# EAGLE board ALU (EAGLE 9.6.2)
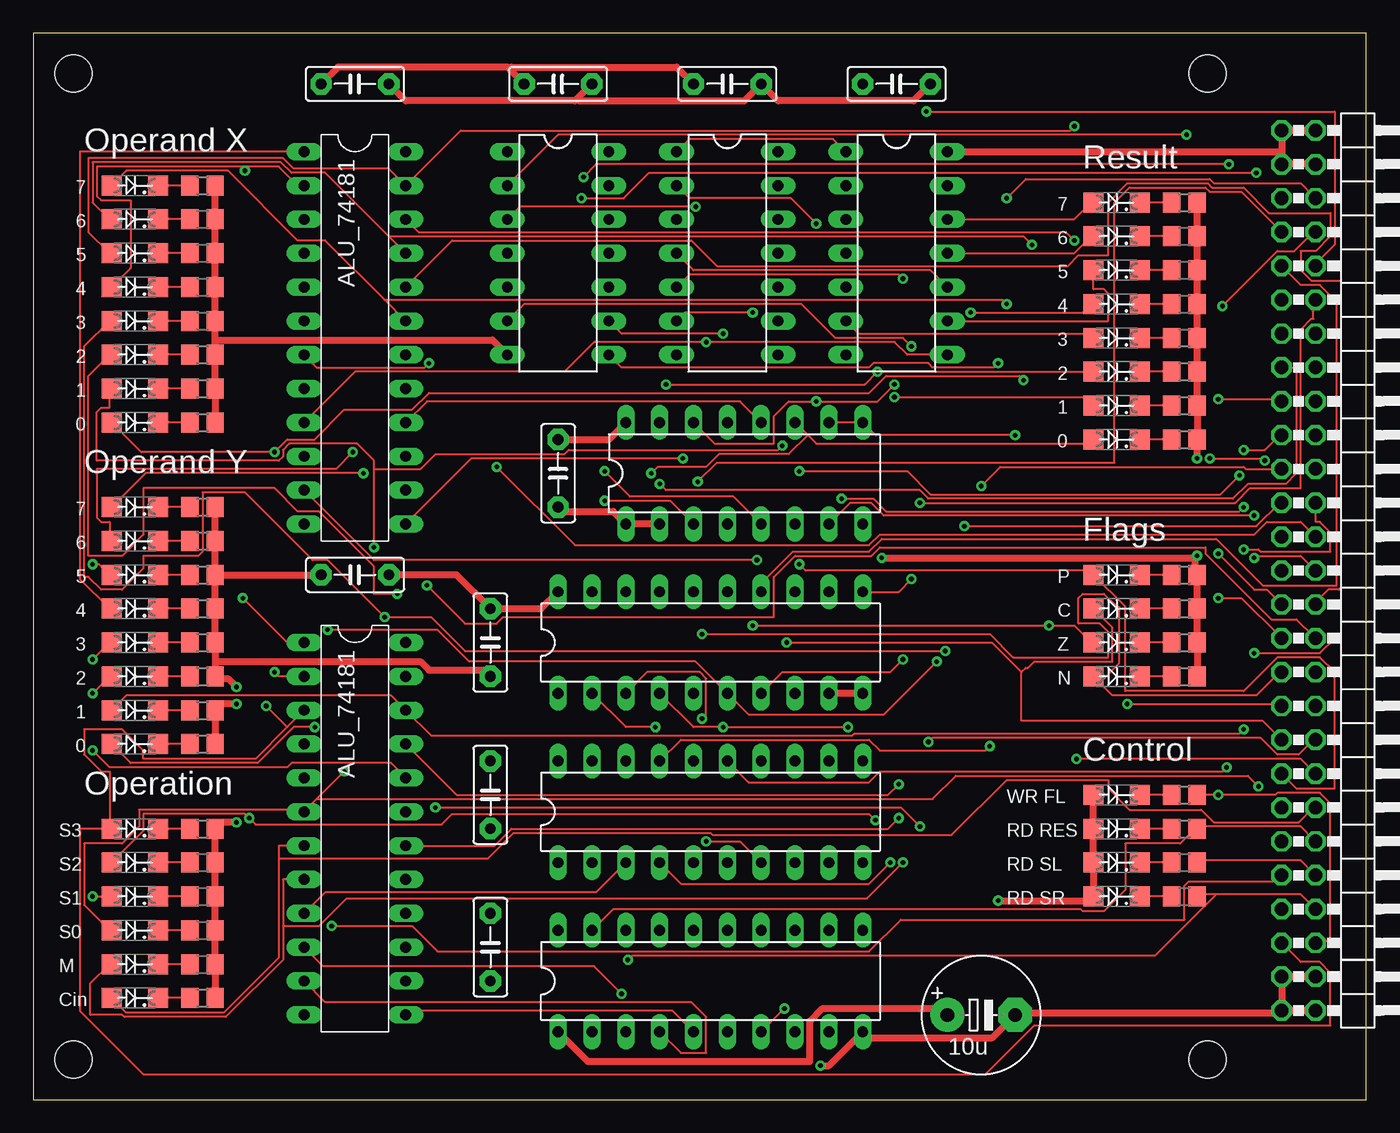
[diagram p0: board, top side]
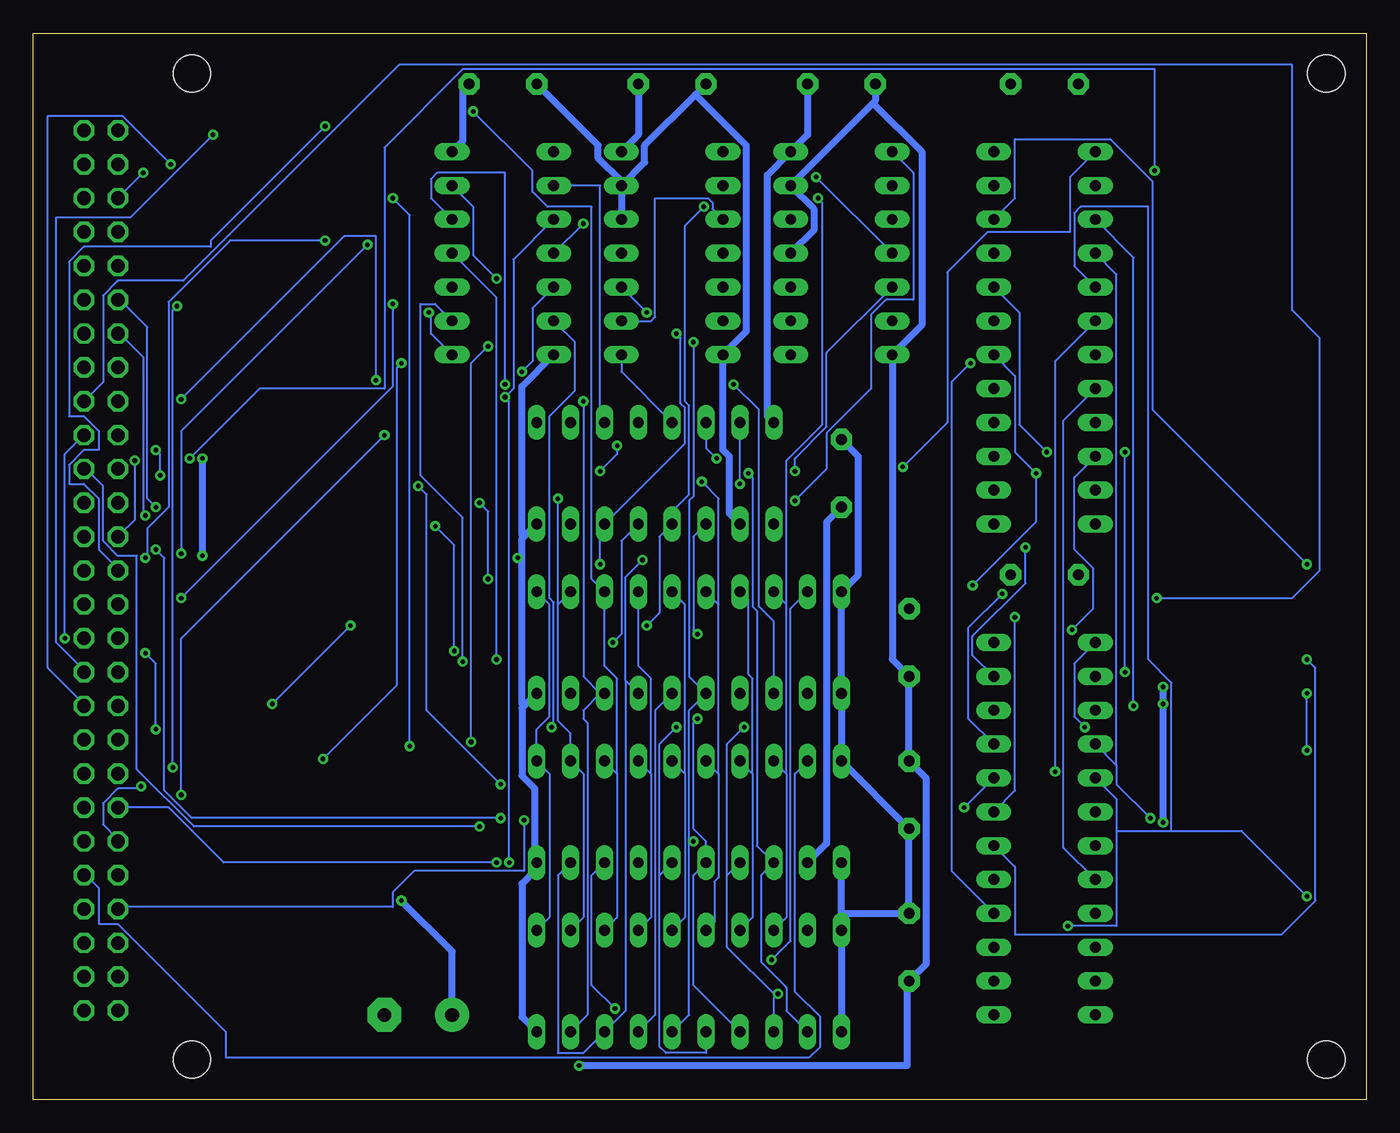
[diagram p1: board, bottom side, seen from below]

Size 100 x 80 mm. Coordinates in mm from the lower left corner, seen from the top.
Outline: 0,0 100,0 100,80 0,80 0,0
Copper layers (1*16): Top 0.035mm / dielectric 1.5mm / Bottom 0.035mm
Design rules "default": minimum track width 6mil, minimum drill 0.35mm, track to track 6mil, track to pad 6mil, pad to pad 6mil, via to via 6mil, smd to smd 6mil, copper to edge 40mil, drill to drill 6mil, minimum pad ring 10mil, minimum via ring 8mil, stop-mask expansion 4mil, vias tented up to drill 0mil, thermal gap 10mil
Net classes: 1 supply: width 0.508 mm
Holes 2.8 mm at 3,77 88.11,77 3,3 88.11,3
vRestrict: area 3,49.8 to 4.1,69.3; area 3,25.7 to 4.1,45.2; area 1.8,6.6 to 4.1,20.8; area 4.8,6.6 to 14.7,21.3; area 4.8,25.7 to 14.7,45.5; area 4.8,49.8 to 14.7,69.6; area 3.8,70.9 to 16,73.2; area 72.9,14.2 to 78.5,23.4; area 78.5,14.2 to 88.4,23.9; area 78.7,25.1 to 86.9,27.2; area 76.7,31 to 78,39.9; area 78.5,30.7 to 88.4,40.4; 9 more areas

## Footprints (pad centres in the part's own frame; a part is rotated, then mirrored left to right if it is on the bottom)
ALU_74181 = drill 0.813 pad 1.321 long: A0 -3.81,11.43; A1 3.81,11.43; A2 3.81,6.35; A3 3.81,1.27; A=B 3.81,-11.43; B0 -3.81,13.97; B1 3.81,8.89; B2 3.81,3.81; B3 3.81,-1.27; CN -3.81,-1.27; COUT 3.81,-6.35; F0 -3.81,-6.35; F1 -3.81,-8.89; F2 -3.81,-11.43; F3 3.81,-13.97; G 3.81,-3.81; GND -3.81,-13.97; M -3.81,-3.81; P 3.81,-8.89; S0 -3.81,1.27; S1 -3.81,3.81; S2 -3.81,6.35; S3 -3.81,8.89; VCC 3.81,13.97
DIL14 = drill 0.813 long: 1 -7.62,-3.81; 2 -5.08,-3.81; 3 -2.54,-3.81; 4 0,-3.81; 5 2.54,-3.81; 6 5.08,-3.81; 7 7.62,-3.81; 8 7.62,3.81; 9 5.08,3.81; 10 2.54,3.81; 11 0,3.81; 12 -2.54,3.81; 13 -5.08,3.81; 14 -7.62,3.81
DIL20 = drill 0.813 long: 1 -11.43,-3.81; 2 -8.89,-3.81; 3 -6.35,-3.81; 4 -3.81,-3.81; 5 -1.27,-3.81; 6 1.27,-3.81; 7 3.81,-3.81; 8 6.35,-3.81; 9 8.89,-3.81; 10 11.43,-3.81; 11 11.43,3.81; 12 8.89,3.81; 13 6.35,3.81; 14 3.81,3.81; 15 1.27,3.81; 16 -1.27,3.81; 17 -3.81,3.81; 18 -6.35,3.81; 19 -8.89,3.81; 20 -11.43,3.81
E5-8,5 = drill 1.016 pad 2.54: + -2.54,0 | drill 1.016 pad 2.54 octagon: - 2.54,0
C5B2.5 = drill 0.813 pad 1.6 octagon: 1 -2.54,0; 2 2.54,0
2X25/90 = drill 1.016 octagon: 1 -29.21,-6.35; 2 -29.21,-3.81; 3 -26.67,-6.35; 4 -26.67,-3.81; 5 -24.13,-6.35; 6 -24.13,-3.81; 7 -21.59,-6.35; 8 -21.59,-3.81; 9 -19.05,-6.35; 10 -19.05,-3.81; 11 -16.51,-6.35; 12 -16.51,-3.81; 13 -13.97,-6.35; 14 -13.97,-3.81; 15 -11.43,-6.35; 16 -11.43,-3.81; 17 -8.89,-6.35; 18 -8.89,-3.81; 19 -6.35,-6.35; 20 -6.35,-3.81; 21 -3.81,-6.35; 22 -3.81,-3.81; 23 -1.27,-6.35; 24 -1.27,-3.81; 25 1.27,-6.35; 26 1.27,-3.81; 27 3.81,-6.35; 28 3.81,-3.81; 29 6.35,-6.35; 30 6.35,-3.81; 31 8.89,-6.35; 32 8.89,-3.81; 33 11.43,-6.35; 34 11.43,-3.81; 35 13.97,-6.35; 36 13.97,-3.81; 37 16.51,-6.35; 38 16.51,-3.81; 39 19.05,-6.35; 40 19.05,-3.81; 41 21.59,-6.35; 42 21.59,-3.81; 43 24.13,-6.35; 44 24.13,-3.81; 45 26.67,-6.35; 46 26.67,-3.81; 47 29.21,-6.35; 48 29.21,-3.81; 49 31.75,-6.35; 50 31.75,-3.81
2X02/90 = drill 1.016 octagon: 1 -1.27,-6.35; 2 -1.27,-3.81; 3 1.27,-6.35; 4 1.27,-3.81
SML1206 = smd 1.5 x 1.5: A 1.75,0; C -1.75,0
R0805 = smd 1.3 x 1.5: 1 -0.95,0; 2 0.95,0
DIL16 = drill 0.813 long: 1 -8.89,-3.81; 2 -6.35,-3.81; 3 -3.81,-3.81; 4 -1.27,-3.81; 5 1.27,-3.81; 6 3.81,-3.81; 7 6.35,-3.81; 8 8.89,-3.81; 9 8.89,3.81; 10 6.35,3.81; 11 3.81,3.81; 12 1.27,3.81; 13 -1.27,3.81; 14 -3.81,3.81; 15 -6.35,3.81; 16 -8.89,3.81

## Placement (x,y rotation side)
ALU0  ALU_74181  [ALU_74181]  24.13,20.32 0 top
ALU1  ALU_74181  [ALU_74181]  24.13,57.15 0 top
AND  74LS08N  [DIL14]  52.07,63.5 270 top
BUFF_R  74LS245N  [DIL20]  50.8,8.89 0 top
BUFF_SL  74LS245N  [DIL20]  50.8,21.59 0 top
BUFF_SR  74LS245N  [DIL20]  50.8,34.29 0 top
C1  10u  [E5-8,5]  71.12,6.35 0 top
C2  10n  [C5B2.5]  39.37,76.2 180 top
C3  10n  [C5B2.5]  24.13,76.2 180 top
C4  10n  [C5B2.5]  52.07,76.2 180 top
C5  10n  [C5B2.5]  34.29,22.86 90 top
C6  10n  [C5B2.5]  34.29,11.43 270 top
C7  10n  [C5B2.5]  64.77,76.2 180 top
C8  10n  [C5B2.5]  34.29,34.29 270 top
C9  10n  [C5B2.5]  24.13,39.37 180 top
C10  10n  [C5B2.5]  39.37,46.99 270 top
JP1  [2X25/90]  100,43.5 270 top
JP2  [2X02/90]  100,7.95 270 top
LED1  green  [SML1206]  7.62,50.8 180 top
LED2  green  [SML1206]  7.62,53.34 180 top
LED3  green  [SML1206]  7.62,55.88 180 top
LED4  green  [SML1206]  7.62,58.42 180 top
LED5  green  [SML1206]  7.62,60.96 180 top
LED6  green  [SML1206]  7.62,63.5 180 top
LED7  green  [SML1206]  7.62,66.04 180 top
LED8  green  [SML1206]  7.62,68.58 180 top
LED9  green  [SML1206]  7.62,26.67 180 top
LED10  green  [SML1206]  7.62,29.21 180 top
LED11  green  [SML1206]  7.62,31.75 180 top
LED12  green  [SML1206]  7.62,34.29 180 top
LED13  green  [SML1206]  7.62,36.83 180 top
LED14  green  [SML1206]  7.62,39.37 180 top
LED15  green  [SML1206]  7.62,41.91 180 top
LED16  green  [SML1206]  7.62,44.45 180 top
LED17  green  [SML1206]  81.28,49.53 180 top
LED18  green  [SML1206]  81.28,52.07 180 top
LED19  green  [SML1206]  81.28,54.61 180 top
LED20  green  [SML1206]  81.28,57.15 180 top
LED21  green  [SML1206]  81.28,59.69 180 top
LED22  green  [SML1206]  81.28,62.23 180 top
LED23  green  [SML1206]  81.28,64.77 180 top
LED24  green  [SML1206]  81.28,67.31 180 top
LED25  yellow  [SML1206]  81.28,31.75 180 top
LED26  yellow  [SML1206]  81.28,34.29 180 top
LED27  yellow  [SML1206]  81.28,36.83 180 top
LED28  yellow  [SML1206]  81.28,39.37 180 top
LED29  yellow  [SML1206]  7.62,12.7 180 top
LED30  yellow  [SML1206]  7.62,15.24 180 top
LED31  yellow  [SML1206]  7.62,17.78 180 top
LED32  yellow  [SML1206]  7.62,20.32 180 top
LED33  yellow  [SML1206]  7.62,10.16 180 top
LED34  red  [SML1206]  81.28,22.86 180 top
LED35  red  [SML1206]  81.28,20.32 180 top
LED36  yellow  [SML1206]  7.62,7.62 180 top
LED37  red  [SML1206]  81.28,17.78 180 top
LED38  red  [SML1206]  81.28,15.24 180 top
NOR  74LS02N  [DIL14]  64.77,63.5 270 top
NOT  74LS04N  [DIL14]  39.37,63.5 270 top
R1  330  [R0805]  12.7,50.8 0 top
R2  330  [R0805]  12.7,53.34 0 top
R3  330  [R0805]  12.7,55.88 0 top
R4  330  [R0805]  12.7,58.42 0 top
R5  330  [R0805]  12.7,60.96 0 top
R6  330  [R0805]  12.7,63.5 0 top
R7  330  [R0805]  12.7,66.04 0 top
R8  330  [R0805]  12.7,68.58 0 top
R9  330  [R0805]  12.7,26.67 0 top
R10  330  [R0805]  12.7,29.21 0 top
R11  330  [R0805]  12.7,31.75 0 top
R12  330  [R0805]  12.7,34.29 0 top
R13  330  [R0805]  12.7,36.83 0 top
R14  330  [R0805]  12.7,39.37 0 top
R15  330  [R0805]  12.7,41.91 0 top
R16  330  [R0805]  12.7,44.45 0 top
R17  330  [R0805]  86.36,49.53 0 top
R18  330  [R0805]  86.36,52.07 0 top
R19  330  [R0805]  86.36,54.61 0 top
R20  330  [R0805]  86.36,57.15 0 top
R21  330  [R0805]  86.36,59.69 0 top
R22  330  [R0805]  86.36,62.23 0 top
R23  330  [R0805]  86.36,64.77 0 top
R24  330  [R0805]  86.36,67.31 0 top
R25  330  [R0805]  86.36,31.75 0 top
R26  330  [R0805]  86.36,34.29 0 top
R27  330  [R0805]  86.36,36.83 0 top
R28  330  [R0805]  86.36,39.37 0 top
R29  330  [R0805]  12.7,12.7 0 top
R30  330  [R0805]  12.7,15.24 0 top
R31  330  [R0805]  12.7,17.78 0 top
R32  330  [R0805]  12.7,20.32 0 top
R33  330  [R0805]  12.7,10.16 0 top
R34  330  [R0805]  86.36,22.86 0 top
R35  330  [R0805]  86.36,20.32 0 top
R36  330  [R0805]  12.7,7.62 0 top
R37  330  [R0805]  86.36,17.78 0 top
R38  330  [R0805]  86.36,15.24 0 top
REG_FLAGS  74LS173N  [DIL16]  53.34,46.99 0 top

## Library data of the parts
ALU0 ALU1 = IsaacAlonso
AND BUFF_R BUFF_SL BUFF_SR NOR NOT REG_FLAGS = 74xx-eu
C1 = rcl; SPICEPREFIX: C
C2-C10 = capacitor-wima
JP1 JP2 = pinhead
LED1-LED38 = led
R1-R38 = rcl; SPICEPREFIX: R

## Nets
!RD_ALU: BUFF_R.19 JP1.44 R35.2
!RD_SL: BUFF_SL.19 JP1.46 R37.2
!RD_SR: BUFF_SR.19 JP1.48 R38.2
!WR_FL: JP1.50 R34.2 REG_FLAGS.9 REG_FLAGS.10
A0: ALU0.A0 JP1.17 LED1.A
A1: ALU0.A1 JP1.19 LED2.A
A2: ALU0.A2 JP1.21 LED3.A
A3: ALU0.A3 JP1.23 LED4.A
A4: ALU1.A0 JP1.25 LED5.A
A5: ALU1.A1 JP1.27 LED6.A
A6: ALU1.A2 JP1.29 LED7.A
A7: ALU1.A3 JP1.31 LED8.A
B0: ALU0.B0 JP1.18 LED9.A
B1: ALU0.B1 JP1.20 LED10.A
B2: ALU0.B2 JP1.22 LED11.A
B3: ALU0.B3 JP1.24 LED12.A
B4: ALU1.B0 JP1.26 LED13.A
B5: ALU1.B1 JP1.28 LED14.A
B6: ALU1.B2 JP1.30 LED15.A
B7: ALU1.B3 JP1.32 LED16.A
BUS0: BUFF_R.18 BUFF_SL.18 BUFF_SR.18 JP1.5
BUS1: BUFF_R.17 BUFF_SL.17 BUFF_SR.17 JP1.6
BUS2: BUFF_R.16 BUFF_SL.16 BUFF_SR.16 JP1.7
BUS3: BUFF_R.15 BUFF_SL.15 BUFF_SR.15 JP1.8
BUS4: BUFF_R.14 BUFF_SL.14 BUFF_SR.14 JP1.9
BUS5: BUFF_R.13 BUFF_SL.13 BUFF_SR.13 JP1.10
BUS6: BUFF_R.12 BUFF_SL.12 BUFF_SR.12 JP1.11
BUS7: BUFF_R.11 BUFF_SL.11 BUFF_SR.11 JP1.12
C_OUT: ALU1.COUT REG_FLAGS.12
CIN: ALU0.CN JP1.42 LED36.A
CLK: JP1.13 REG_FLAGS.7
CLR_FL: JP1.15 REG_FLAGS.15
FL_C: JP1.37 LED27.A NOT.5 REG_FLAGS.5
FL_N: JP1.33 LED25.A NOT.1 REG_FLAGS.3
FL_P: JP1.39 LED28.A NOT.9 REG_FLAGS.6
FL_Z: JP1.35 LED26.A NOT.3 REG_FLAGS.4
GND [supply]: AND.7 AND.12 AND.13 BUFF_R.10 BUFF_SL.2 BUFF_SL.10 BUFF_SR.9 BUFF_SR.10 C1.- C2.2 C3.2 C4.2 C5.2 C6.2 C7.2 C8.2 C9.2 C10.2 JP2.1 JP2.2 JP2.3 JP2.4 NOR.7 NOT.7 NOT.11 NOT.13 R1.2 R2.2 R3.2 R4.2 R5.2 R6.2 R7.2 R8.2 R9.2 R10.2 R11.2 R12.2 R13.2 R14.2 R15.2 R16.2 R17.2 R18.2 R19.2 R20.2 R21.2 R22.2 R23.2 R24.2 R25.2 R26.2 R27.2 R28.2 R29.2 R30.2 R31.2 R32.2 R33.2 R36.2 REG_FLAGS.1 REG_FLAGS.2 REG_FLAGS.8
IFL_C: JP1.38 NOT.6
IFL_N: JP1.34 NOT.2
IFL_P: JP1.40 NOT.8
IFL_Z: JP1.36 NOT.4
M: ALU0.M ALU1.M JP1.41 LED33.A
N$1: ALU0.COUT ALU1.CN
N$2: AND.1 NOR.1
N$3: AND.2 NOR.4
N$4: AND.4 NOR.10
N$5: AND.5 NOR.13
N$6: AND.6 AND.10
N$7: AND.3 AND.9
N$8: LED29.C R29.1
N$9: LED1.C R1.1
N$10: LED2.C R2.1
N$11: LED3.C R3.1
N$12: LED4.C R4.1
N$13: LED5.C R5.1
N$14: LED6.C R6.1
N$15: LED7.C R7.1
N$16: LED8.C R8.1
N$17: LED30.C R30.1
N$18: LED9.C R9.1
N$19: LED10.C R10.1
N$20: LED11.C R11.1
N$21: LED12.C R12.1
N$22: LED13.C R13.1
N$23: LED14.C R14.1
N$24: LED15.C R15.1
N$25: LED16.C R16.1
N$26: LED31.C R31.1
N$27: LED17.C R17.1
N$28: LED18.C R18.1
N$29: LED19.C R19.1
N$30: LED20.C R20.1
N$31: LED21.C R21.1
N$32: LED22.C R22.1
N$33: LED23.C R23.1
N$34: LED24.C R24.1
N$35: LED25.C R25.1
N$36: LED26.C R26.1
N$37: LED27.C R27.1
N$38: LED28.C R28.1
N$39: LED32.C R32.1
N$40: LED33.C R33.1
N$41: LED34.C R34.1
N$42: LED35.C R35.1
N$43: LED36.C R36.1
N$44: LED37.C R37.1
N$45: LED38.C R38.1
R0: ALU0.F0 BUFF_R.2 BUFF_SL.3 LED17.A NOR.2 REG_FLAGS.11
R1: ALU0.F1 BUFF_R.3 BUFF_SL.4 BUFF_SR.2 LED18.A NOR.3
R2: ALU0.F2 BUFF_R.4 BUFF_SL.5 BUFF_SR.3 LED19.A NOR.5
R3: ALU0.F3 BUFF_R.5 BUFF_SL.6 BUFF_SR.4 LED20.A NOR.6
R4: ALU1.F0 BUFF_R.6 BUFF_SL.7 BUFF_SR.5 LED21.A NOR.8
R5: ALU1.F1 BUFF_R.7 BUFF_SL.8 BUFF_SR.6 LED22.A NOR.9
R6: ALU1.F2 BUFF_R.8 BUFF_SL.9 BUFF_SR.7 LED23.A NOR.11
R7: ALU1.F3 BUFF_R.9 BUFF_SR.8 LED24.A NOR.12 REG_FLAGS.14
S0: ALU0.S0 ALU1.S0 JP1.43 LED29.A
S1: ALU0.S1 ALU1.S1 JP1.45 LED30.A
S2: ALU0.S2 ALU1.S2 JP1.47 LED31.A
S3: ALU0.S3 ALU1.S3 JP1.49 LED32.A
VCC [supply]: AND.14 BUFF_R.1 BUFF_R.20 BUFF_SL.1 BUFF_SL.20 BUFF_SR.1 BUFF_SR.20 C1.+ C2.1 C3.1 C4.1 C5.1 C6.1 C7.1 C8.1 C9.1 C10.1 JP1.1 JP1.2 JP1.3 JP1.4 LED34.A LED35.A LED37.A LED38.A NOR.14 NOT.14 REG_FLAGS.16
Z: AND.8 REG_FLAGS.13

## Tracks (layer width: path | path; a pad name or v marks a point on that pad's centre or on a via)
!RD_ALU
  Top 0.152: JP1.44 96.04,19.53 95.09,20.48 87.47,20.48 R35.2 87.15,20.32 86.04,19.21 81.92,19.21 81.92,15.72 80.33,14.13 78.74,14.13 78.58,14.29 43.5,14.29 BUFF_R.19
!RD_SL
  Top 0.152: R37.2 87.47,17.94 95.09,17.94 96.04,16.99 JP1.46
  Bottom 0.152: BUFF_SL.19 42.86,24.45 42.86,8.1 40.96,6.19 40.96,3.97 41.75,3.17 85.57,3.17 85.57,5.08 93.66,13.18 95.09,13.18 95.09,15.88 96.04,16.83 JP1.46
!RD_SR  (via drill 0.35)
  Top 0.152: 88.74,15.4 95.09,15.4 96.04,14.45 JP1.48 | 88.74,15.4 87.47,15.4 R38.2 | v44.61,10.48 44.93,10.79 84.14,10.79 88.74,15.4
  Bottom 0.152: BUFF_SR.19 43.18,36.83 43.18,11.91 v44.61,10.48
!WR_FL  (via drill 0.35)
  Top 0.152: REG_FLAGS.10 REG_FLAGS.9 63.18,49.85 v73.66,49.85 | R34.2 v88.9,22.86 93.19,22.86 93.34,23.02 96.52,23.02 97.31,22.23 97.31,11.91 96.2,11.91 JP1.50
  Bottom 0.152: v73.66,49.85 88.9,34.61 v88.9,22.86
A0  (via drill 0.35)
  Top 0.152: v18.1,32.07 18.41,31.75 ALU0.A0 | LED1.A 8.1,48.58 v18.1,48.58 19.05,49.53 21.11,49.53 23.34,51.75 28.42,51.75 29.69,53.02 62.71,53.02 63.98,54.29 73.98,54.29 v74.3,53.98 | v88.9,52.55 93.5,52.55 JP1.17
  Bottom 0.152: v18.1,32.07 v18.1,48.58 | v88.9,52.55 76.68,64.77 74.3,64.77 v74.3,53.98
A1  (via drill 0.35)
  Top 0.152: v25.56,41.43 25.56,47.31 | 25.56,47.31 25.56,47.94 24.29,49.21 19.21,49.21 18.73,48.74 18.73,48.26 18.41,47.94 4.76,47.94 4.76,51.59 5.08,51.91 5.71,51.91 5.71,53.34 LED2.A | v90.81,48.74 92.39,48.74 93.5,49.85 JP1.19 | v90.49,46.83 89.06,45.4 67.31,45.4 65.56,47.15 v57.47,47.15 | v56.2,49.05 55.88,48.74 40.16,48.74 39.85,48.42 30.16,48.42 29.05,47.31 25.56,47.31
  Bottom 0.152: v25.56,41.43 25.56,38.73 29.53,34.77 29.53,33.34 ALU0.A1 | v90.81,48.74 90.49,48.42 v90.49,46.83 | v57.47,47.15 56.2,48.42 v56.2,49.05
A2  (via drill 0.35)
  Top 0.152: v27.3,37.94 25.56,37.94 25.56,40.01 21.43,44.13 19.84,44.13 18.1,45.88 8.26,45.88 8.26,42.39 6.67,40.8 4.13,40.8 4.13,54.29 5.71,55.88 LED3.A | v71.12,46.04 72.55,47.47 90.81,47.47 90.96,47.31 93.5,47.31 JP1.21 | v64.93,23.65 64.14,22.86 31.75,22.86 ALU0.A2
  Bottom 0.152: v27.3,37.94 29.84,35.4 29.84,28.57 ALU0.A2 | v71.12,46.04 70.48,45.4 70.48,29.21 v64.93,23.65
A3  (via drill 0.35)
  Top 0.152: LED4.A 5.71,58.42 3.81,56.52 3.81,39.21 4.13,39.21 5.08,38.26 6.67,38.26 8.26,39.85 8.26,40.8 12.38,40.8 12.7,41.12 12.7,45.56 15.88,45.56 20.95,40.48 22.07,40.48 v26.35,36.2 29.84,36.2 32.38,33.66 v68.42,33.66 | v69.85,43.02 91.76,43.02 93.5,44.77 JP1.23
  Bottom 0.152: v26.35,36.2 26.35,23.18 ALU0.A3 | v69.85,43.02 68.42,41.59 v68.42,33.66
A4  (via drill 0.35)
  Top 0.152: 15.88,70.01 18.41,70.01 19.84,68.58 ALU1.A0 | 15.88,70.01 4.76,70.01 4.76,67.79 5.08,67.47 7.3,67.47 7.3,62.39 LED5.A | v92.39,47.94 92.23,48.1 v88.27,48.1 | 15.88,70.01 v15.88,69.69
  Bottom 0.152: v92.39,47.94 92.39,43.5 93.5,42.39 JP1.25 | v88.27,48.1 83.03,53.34 73.66,53.34 73.66,71.44 67.79,77.31 15.88,77.31 v15.88,69.69
A5  (via drill 0.35)
  Top 0.152: LED6.A 5.71,63.5 4.13,65.09 4.13,70.64 18.73,70.64 19.53,69.85 26.67,69.85 ALU1.A1 32.07,72.71 77.79,72.71 v78.11,73.03
  Bottom 0.152: v78.11,73.03 86.68,64.45 86.68,63.98 96.2,63.98 97.31,62.87 97.31,51.28 96.2,51.28 95.09,50.16 95.09,48.74 96.2,48.74 97.31,47.62 97.31,46.2 96.2,46.2 95.09,45.09 95.09,41.27 93.66,39.85 JP1.27
A6  (via drill 0.35)
  Top 0.152: ALU1.A2 26.67,64.77 | 26.67,64.77 21.91,69.53 19.37,69.53 18.57,70.33 4.45,70.33 4.45,67.31 5.71,66.04 LED7.A | v88.9,40.96 91.6,38.26 92.55,38.26 93.5,37.31 JP1.29 | v74.93,64.14 74.3,64.77 26.67,64.77
  Bottom 0.152: v88.9,40.96 88.9,50.16 v74.93,64.14
A7  (via drill 0.35)
  Top 0.152: ALU1.A3 26.35,60.01 | 26.35,60.01 21.91,64.45 19.84,64.45 14.61,69.69 6.99,69.69 LED8.A | v88.9,37.62 90.65,37.62 93.5,34.77 JP1.31 | v73.03,59.69 72.71,60.01 26.35,60.01
  Bottom 0.152: v88.9,37.62 73.03,53.5 v73.03,59.69
B0  (via drill 0.35)
  Top 0.152: v21.11,27.94 19.53,27.94 16.83,25.24 7.3,25.24 LED9.A | v15.72,37.62 19.05,34.29 ALU0.B0
  Bottom 0.152: v21.11,27.94 21.91,28.73 21.91,32.7 ALU0.B0 | v15.72,37.62 5.56,37.62 3.49,39.69 3.49,57.15 5.56,59.21 5.56,77.63 72.55,77.63 88.74,61.44 93.66,61.44 94.77,60.33 94.77,53.82 96.04,52.55 JP1.18
B1  (via drill 0.35)
  Top 0.152: LED10.A 6.99,30.32 26.83,30.32 ALU0.B1 29.84,27.3 61.44,27.3 61.59,27.46 90.49,27.46 v90.81,27.78 | v97.63,34.61 96.52,33.5 v91.6,33.5
  Bottom 0.152: v97.63,34.61 97.63,48.42 96.2,49.85 JP1.20 | v91.6,33.5 90.81,32.7 v90.81,27.78
B2  (via drill 0.35)
  Top 0.152: v4.45,30.48 5.71,31.75 LED11.A | v4.45,26.19 5.71,24.92 19.05,24.92 19.37,25.24 26.83,25.24 ALU0.B2 | v66.52,20.48 65.09,21.91 v30.16,21.91
  Bottom 0.152: v4.45,26.19 v4.45,30.48 | v66.52,20.48 87.95,20.48 92.23,24.77 92.23,40.8 93.66,40.8 94.77,41.91 94.77,46.04 96.04,47.31 JP1.22 | ALU0.B2 v30.16,21.91
B3  (via drill 0.35)
  Top 0.152: v4.45,33.02 5.71,34.29 LED12.A | v90.81,41.27 91.92,41.27 92.08,41.12 97.31,41.12 97.31,42.55 96.52,43.34 96.2,43.34 96.2,44.77 JP1.24 | v64.93,21.11 64.14,20.32 35.88,20.32 34.61,19.05 ALU0.B3
  Bottom 0.152: v4.45,33.02 3.81,32.38 3.81,14.92 6.35,12.38 26.35,12.38 26.35,17.46 ALU0.B3 | v90.81,41.27 90.17,40.64 90.17,23.18 88.11,21.11 v64.93,21.11
B4  (via drill 0.35)
  Top 0.152: ALU1.B0 3.49,71.12 3.49,39.05 5.71,36.83 LED13.A | v34.77,47.47 40.64,41.59 62.71,41.59 63.5,42.39 91.6,42.39 92.55,43.34 95.09,43.34 96.04,42.39 JP1.26
  Bottom 0.152: v34.77,47.47 31.43,50.8 31.43,62.07 28.42,65.09 22.23,65.09 22.23,69.22 ALU1.B0
B5  (via drill 0.35)
  Top 0.152: v4.45,40.16 4.92,40.16 5.71,39.37 LED14.A | v91.6,40.64 91.76,40.8 95.09,40.8 96.04,39.85 JP1.28 | v78.11,64.45 77.47,65.09 28.89,65.09 ALU1.B1
  Bottom 0.152: v4.45,40.16 16.03,51.75 16.03,68.9 19.21,72.07 26.35,72.07 26.35,67.63 ALU1.B1 | v91.6,40.64 91.44,40.8 91.44,42.86 89.85,44.45 89.85,59.85 85.25,64.45 v78.11,64.45
B6  (via drill 0.35)
  Top 0.152: v23.97,48.58 22.7,47.31 4.76,47.31 4.76,43.66 5.08,43.34 5.71,43.34 5.71,41.91 LED15.A | ALU1.B2 31.43,64.45 49.37,64.45 51.28,62.55 77.63,62.55 78.42,63.34 80.64,63.34 80.64,67.31 82.07,68.74 88.11,68.74 88.42,68.42 90.81,68.42 92.71,66.52 97.31,66.52 97.31,64.77 96.2,63.66 95.09,63.66 95.09,62.23 95.89,61.44 98.11,61.44 98.11,38.42 97.95,38.26 97.16,38.26 96.2,37.31 JP1.30
  Bottom 0.152: v23.97,48.58 26.04,50.64 26.04,59.05 ALU1.B2
B7  (via drill 0.35)
  Top 0.152: v24.77,46.99 8.41,46.99 LED16.A | v29.53,38.58 32.38,35.72 34.77,35.72 35.24,36.2 55.56,36.2 55.56,39.21 57.15,40.8 62.87,40.8 63.5,41.43 87.95,41.43 87.95,40.96 92.87,36.04 94.77,36.04 96.04,34.77 JP1.32
  Bottom 0.152: ALU1.B3 26.35,54.29 26.35,48.58 v24.77,46.99 24.77,43.34 v29.53,38.58
BUS0  (via drill 0.35)
  Top 0.152: v91.76,69.53 46.2,69.53 44.29,67.63 v41.12,67.63
  Bottom 0.152: BUFF_R.18 43.5,13.65 43.5,24.45 | BUFF_SL.18 43.5,24.45 | 43.5,37.15 BUFF_SR.18 | 43.5,24.45 43.5,37.15 | v91.76,69.53 93.5,67.79 JP1.5 | v41.12,67.63 40.8,67.31 40.8,50.64 43.5,47.94 43.5,37.15
BUS1  (via drill 0.35)
  Top 0.152: v73.03,67.63 74.45,69.06 88.27,69.06 88.58,68.74 95.09,68.74 96.04,67.79 JP1.6 | v71.75,26.51 71.44,26.19 63.5,26.19 62.71,26.99 48.58,26.99 BUFF_SL.17
  Bottom 0.152: BUFF_R.17 46.04,13.65 46.04,24.45 | BUFF_SL.17 46.04,24.45 | BUFF_SR.17 46.35,37.47 46.35,31.91 46.04,31.59 46.04,24.45 | v73.03,67.63 71.75,66.36 v71.75,26.51
BUS2  (via drill 0.35)
  Top 0.152: v49.85,46.35 51.28,47.78 81.12,47.78 81.12,67.31 82.23,68.42 87.95,68.42 88.27,68.1 90.65,68.1 93.5,65.25 JP1.7
  Bottom 0.152: BUFF_R.16 48.9,13.34 48.9,16.35 48.58,16.67 48.58,24.45 | BUFF_SL.16 48.58,24.45 | 48.58,37.15 BUFF_SR.16 | 48.58,24.45 48.58,37.15 | v49.85,46.35 48.58,45.09 48.58,37.15
BUS3  (via drill 0.35)
  Top 0.152: v89.22,59.53 93.34,63.66 94.61,63.66 96.04,65.09 JP1.8 | v89.53,24.92 89.22,24.61 63.5,24.61 62.71,23.81 53.66,23.81 BUFF_SL.15
  Bottom 0.152: BUFF_R.15 51.12,13.65 51.12,24.45 | BUFF_SL.15 51.12,24.45 | BUFF_SR.15 51.12,37.15 51.12,24.45 | v89.22,59.53 89.53,59.21 v89.53,24.92
BUS4
  Top 0.152: BUFF_SR.14 54.61,38.73 56.99,41.12 62.71,41.12 63.66,42.07 88.74,42.07 92.23,38.58 97.79,38.58 97.79,59.85 96.52,61.12 95.09,61.12 93.66,62.55 JP1.9
  Bottom 0.152: BUFF_R.14 53.66,13.65 53.66,24.45 | BUFF_SL.14 53.66,24.45 | BUFF_SR.14 54.61,32.54 53.66,31.59 53.66,24.45
BUS5  (via drill 0.35)
  Top 0.152: v66.99,74.14 97.63,74.14 97.63,64.14 96.2,62.71 JP1.10
  Bottom 0.152: BUFF_R.13 56.2,13.65 56.2,24.45 | BUFF_SL.13 56.2,24.45 | 56.2,24.45 56.2,31.59 57.15,32.54 BUFF_SR.13 58.1,39.05 58.1,66.99 61.44,66.99 62.55,68.1 62.55,69.69 v66.99,74.14
BUS6  (via drill 0.35)
  Top 0.152: v90.81,44.45 90.49,44.13 63.98,44.13 63.02,45.09 v60.64,45.09
  Bottom 0.152: BUFF_R.12 58.74,13.65 58.74,24.45 BUFF_SL.12 59.69,27.46 60.64,28.42 60.64,37.15 | 60.64,37.15 BUFF_SR.12 | v90.81,44.45 91.44,45.09 91.44,57.94 93.5,60.01 JP1.11 | 60.64,37.15 v60.64,45.09
BUS7  (via drill 0.35)
  Top 0.152: v66.52,44.77 90.17,44.77 91.28,45.88 95.09,45.88 95.09,57.78 95.89,58.58 96.04,58.58 96.04,60.01 JP1.12 | v65.88,39.05 64.93,38.1 BUFF_SR.11
  Bottom 0.152: BUFF_R.11 61.28,13.65 61.28,24.45 BUFF_SL.11 62.23,27.78 61.28,28.73 61.28,37.15 BUFF_SR.11 | v66.52,44.77 65.88,44.13 v65.88,39.05
C_OUT
  Top 0.152: ALU1.COUT 29.53,52.39 53.02,52.39 REG_FLAGS.12
CIN
  Top 0.152: 18.41,18.1 18.41,19.05 ALU0.CN | 18.41,18.1 18.41,10.64 14.29,6.51 6.99,6.51 LED36.A | 18.41,18.1 34.13,18.1 36.04,20 50.8,20 50.96,19.84 68.9,19.84 73.03,23.97 80.64,23.97 80.64,23.34 82.23,21.75 87.63,21.75 88.58,20.8 94.93,20.8 96.04,21.91 JP1.42
CLK  (via drill 0.35)
  Top 0.152: REG_FLAGS.7 61.28,44.77 62.87,44.77 63.82,43.81 v91.6,43.81
  Bottom 0.152: v91.6,43.81 91.76,43.97 91.76,55.72 93.5,57.47 JP1.13
CLR_FL  (via drill 0.35)
  Top 0.152: v46.99,46.2 47.47,45.72 66.52,45.72 67.15,45.09 90.01,45.09 91.12,46.2 93.98,46.2 94.77,46.99 94.77,54.93 93.66,54.93 JP1.15
  Bottom 0.152: v46.99,46.2 REG_FLAGS.15
FL_C  (via drill 0.35)
  Top 0.152: 74.14,32.07 74.45,32.38 74.61,32.38 75.09,32.86 80.96,32.86 80.96,35.4 LED27.A | 74.14,32.07 74.14,28.42 92.23,28.42 93.5,27.15 JP1.37 | v42.86,47.15 44.77,45.24 52.55,45.24 REG_FLAGS.5 | 74.14,32.07 71.91,34.29 v56.52,34.29
  Bottom 0.152: NOT.5 40.48,56.04 40.48,50.48 42.86,48.1 v42.86,47.15 | v56.52,34.29 55.88,34.92 55.88,41.91 REG_FLAGS.5
FL_N  (via drill 0.35)
  Top 0.152: 80.01,31.27 80.96,30.32 91.76,30.32 93.5,32.07 JP1.33 | 80.01,31.27 LED25.A 80.01,31.27 | REG_FLAGS.3 47.78,44.93 v42.86,44.93 | 80.01,31.27 81.44,32.7 81.44,36.99 81.28,36.99 80.33,37.94 78.74,37.94 78.42,37.62 78.42,35.72 80.01,35.72 80.64,35.08 80.64,33.18 73.5,33.18 71.75,34.92 v50.16,34.92
  Bottom 0.152: v42.86,44.93 40.48,47.31 40.48,50.01 37.15,53.34 37.15,58.9 36.04,60.01 33.97,60.01 33.97,69.53 NOT.1 | v50.16,34.92 50.48,35.24 50.48,42.23 REG_FLAGS.3
FL_P  (via drill 0.35)
  Top 0.152: JP1.39 93.66,24.45 94.77,23.34 97.63,23.34 97.63,32.07 96.52,33.18 93.34,33.18 90.81,30.64 81.92,30.64 81.92,36.99 LED28.A 79.38,39.37 79.06,39.69 57.94,39.69 v57.47,40.16 | NOT.9 44.13,57.47 v51.75,57.47
  Bottom 0.152: v57.47,40.16 57.47,42.86 REG_FLAGS.6 51.12,49.21 51.12,51.91 51.44,52.23 51.44,57.15 v51.75,57.47
FL_Z  (via drill 0.35)
  Top 0.152: v53.98,35.56 v76.2,35.56 78.11,35.56 79.38,34.29 LED26.A | NOT.3 36.51,66.99 v49.69,66.99 | v82.07,29.69 93.5,29.69 JP1.35
  Bottom 0.152: v53.98,35.56 53.02,36.51 53.02,42.23 REG_FLAGS.4 52.07,44.13 50.8,45.4 50.8,52.07 51.12,52.39 51.12,65.56 v49.69,66.99 | v76.2,35.56 v82.07,29.69
GND  (via drill 0.35)
  Top 0.508: JP2.3 93.66,6.67 96.04,6.67 JP2.4 | JP2.2 96.04,9.21 93.66,9.21 JP2.1 93.66,9.05 93.66,6.83 JP2.3 | JP2.3 93.5,6.51 73.82,6.51 C1.- 71.91,4.6 62.71,4.6 BUFF_R.10 59.69,2.54 v59.05,2.54 | R24.2 87.31,64.93 R23.2 87.31,62.39 R22.2 87.31,59.85 R21.2 87.31,57.31 R20.2 87.31,54.77 R19.2 87.31,52.23 R18.2 R17.2 87.31,49.37 v87.31,48.1 | R25.2 R26.2 87.31,34.45 R27.2 87.31,36.99 R28.2 87.15,39.53 87.15,40.64 | BUFF_SR.10 BUFF_SR.9 | v63.66,40.64 87.15,40.64 | v87.31,40.8 87.15,40.64 | R36.2 R33.2 13.65,10.32 R29.2 13.65,12.86 R30.2 13.65,15.4 R31.2 13.65,17.94 R32.2 13.81,20.48 14.13,20.8 v15.24,20.8 | R9.2 R10.2 13.81,29.37 14.13,29.69 v15.24,29.69 | 13.65,32.86 R12.2 13.65,34.45 R13.2 13.65,36.99 R14.2 | 13.65,32.86 R11.2 13.81,31.59 14.61,31.59 v15.24,30.96 | R14.2 13.65,39.53 R15.2 13.65,42.07 R16.2 | R14.2 C9.2 | C8.2 33.81,32.23 29.69,32.23 29.05,32.86 13.65,32.86 | REG_FLAGS.2 REG_FLAGS.1 43.5,44.13 39.69,44.13 C10.2 | R1.2 R2.2 13.65,53.5 R3.2 13.65,56.04 13.65,56.99 | 13.65,56.99 R4.2 13.65,58.58 R5.2 13.65,61.12 R6.2 13.65,63.66 R7.2 13.65,66.2 R8.2 | NOT.7 34.45,56.99 13.65,56.99 | C3.2 22.86,77.47 35.56,77.47 35.72,77.31 | C2.2 35.72,77.31 | C4.2 48.26,77.47 35.88,77.47 35.72,77.31
  Bottom 0.508: BUFF_SR.10 63.18,29.53 | 63.18,29.53 63.34,29.37 63.34,24.29 62.39,23.34 62.39,17.94 BUFF_SL.10 62.39,17.62 62.39,17.14 63.34,16.19 63.34,6.19 BUFF_R.10 | 63.18,42.23 63.34,42.07 63.34,40.64 | 63.18,42.23 REG_FLAGS.8 | 63.34,40.64 63.34,29.69 63.18,29.53 | NOR.7 63.34,53.5 63.34,42.39 63.18,42.23 | v63.66,40.64 63.34,40.64 | v87.31,40.8 v87.31,48.1 | v15.24,30.96 v15.24,29.69 v15.24,20.8 | REG_FLAGS.2 47.78,43.97 47.78,48.26 48.26,48.74 AND.7 46.51,57.63 46.51,71.6 50.32,75.41 | BUFF_SL.2 40.48,19.21 40.48,43.34 C10.2 | AND.13 AND.12 | 50.32,75.41 54.13,71.6 54.13,70.33 AND.13 | 50.32,75.41 C4.2 | C7.2 57.63,71.6 57.63,70.64 55.88,68.9 AND.13 | NOT.11 41.43,65.25 41.43,66.83 NOT.13 36.99,74.77 | 36.99,74.77 36.83,74.93 C2.2 | 36.99,74.77 33.34,71.12 33.34,58.1 NOT.7 35.56,33.02 C8.2 C5.2 33.02,24.13 33.02,10.16 C6.2 34.45,8.73 34.45,2.54 v59.05,2.54
IFL_C  (via drill 0.35)
  Top 0.152: NOT.6 36.83,59.69 57.63,59.69 60.17,57.15 65.25,57.15 v65.88,56.52 | v67.15,26.83 67.47,27.15 92.08,27.15 93.34,25.88 94.93,25.88 96.04,26.99 JP1.38
  Bottom 0.152: v65.88,56.52 67.15,55.24 v67.15,26.83
IFL_N  (via drill 0.35)
  Top 0.152: NOT.2 39.37,72.39 v86.52,72.39
  Bottom 0.152: v86.52,72.39 92.71,66.2 98.27,66.2 98.27,34.29 96.2,32.23 JP1.34
IFL_P  (via drill 0.35)
  Top 0.152: NOT.8 44.13,54.93 62.71,54.93 63.02,55.24 67.15,55.24 67.47,54.93 72.07,54.93 v72.39,55.24 | v78.26,25.56 95.09,25.56 96.04,24.61 JP1.40
  Bottom 0.152: v72.39,55.24 72.71,54.93 72.71,31.11 v78.26,25.56
IFL_Z  (via drill 0.35)
  Top 0.152: v41.27,69.22 42.23,70.17 v89.69,70.17
  Bottom 0.152: v41.27,69.22 NOT.4 | v89.69,70.17 93.34,73.82 98.9,73.82 98.9,32.38 96.2,29.69 JP1.36
M  (via drill 0.35)
  Top 0.152: 18.73,13.02 18.73,16.51 ALU0.M | 18.73,13.02 18.73,10.48 14.45,6.19 6.83,6.19 6.67,6.35 4.29,6.35 4.29,8.73 5.71,10.16 LED33.A | v65.25,17.78 62.55,15.08 23.5,15.08 21.43,13.02 18.73,13.02
  Bottom 0.152: ALU1.M 22.7,50.96 22.7,18.89 ALU0.M | v65.25,17.78 85.72,17.78 89.85,21.91 93.5,21.91 JP1.41
N$1  (via drill 0.35)
  Top 0.152: v29.69,55.24 29.37,54.93 21.27,54.93 ALU1.CN
  Bottom 0.152: ALU0.COUT 31.11,17.14 31.11,53.82 v29.69,55.24
N$2
  Top 0.152: AND.1 49.21,72.07 60.01,72.07 NOR.1
N$3  (via drill 0.35)
  Top 0.152: AND.2 49.21,67.63 56.83,67.63 v58.74,65.72
  Bottom 0.152: NOR.4 v58.74,65.72
N$4
  Top 0.152: AND.4 49.53,62.23 67.31,62.23 NOR.10
N$5  (via drill 0.35)
  Top 0.152: AND.5 49.21,61.91 64.93,61.91 v65.25,61.59
  Bottom 0.152: v65.25,61.59 66.99,63.34 66.99,66.99 NOR.13
N$6  (via drill 0.35)
  Top 0.152: AND.6 48.9,59.05 v53.98,59.05
  Bottom 0.152: AND.10 v53.98,59.05
N$7
  Bottom 0.152: AND.3 49.05,66.83 49.05,67.31 49.37,67.63 53.34,67.63 53.34,58.74 53.66,58.42 AND.9
N$8
  Top 0.152: R29.1 LED29.C
N$9
  Top 0.152: R1.1 LED1.C
N$10
  Top 0.152: R2.1 LED2.C
N$11
  Top 0.152: R3.1 LED3.C
N$12
  Top 0.152: R4.1 LED4.C
N$13
  Top 0.152: R5.1 LED5.C
N$14
  Top 0.152: R6.1 LED6.C
N$15
  Top 0.152: R7.1 LED7.C
N$16
  Top 0.152: R8.1 LED8.C
N$17
  Top 0.152: R30.1 LED30.C
N$18
  Top 0.152: R9.1 LED9.C
N$19
  Top 0.152: R10.1 LED10.C
N$20
  Top 0.152: R11.1 LED11.C
N$21
  Top 0.152: R12.1 LED12.C
N$22
  Top 0.152: R13.1 LED13.C
N$23
  Top 0.152: R14.1 LED14.C
N$24
  Top 0.152: R15.1 LED15.C
N$25
  Top 0.152: R16.1 LED16.C
N$26
  Top 0.152: R31.1 LED31.C
N$27
  Top 0.152: R17.1 LED17.C
N$28
  Top 0.152: R18.1 LED18.C
N$29
  Top 0.152: R19.1 LED19.C
N$30
  Top 0.152: R20.1 LED20.C
N$31
  Top 0.152: R21.1 LED21.C
N$32
  Top 0.152: R22.1 LED22.C
N$33
  Top 0.152: R23.1 LED23.C
N$34
  Top 0.152: R24.1 LED24.C
N$35
  Top 0.152: R25.1 LED25.C
N$36
  Top 0.152: R26.1 LED26.C
N$37
  Top 0.152: R27.1 LED27.C
N$38
  Top 0.152: R28.1 LED28.C
N$39
  Top 0.152: R32.1 LED32.C
N$40
  Top 0.152: R33.1 LED33.C
N$41
  Top 0.152: R34.1 LED34.C
N$42
  Top 0.152: R35.1 LED35.C
N$43
  Top 0.152: R36.1 LED36.C
N$44
  Top 0.152: R37.1 LED37.C
N$45
  Top 0.152: R38.1 LED38.C
R0  (via drill 0.35)
  Top 0.152: ALU0.F0 21.91,15.56 42.23,15.56 BUFF_SL.3 | REG_FLAGS.11 58.1,49.85 | 58.1,49.85 58.74,49.21 79.06,49.21 79.38,49.53 LED17.A | v46.35,46.99 46.83,47.47 50.48,47.47 51.44,48.42 56.67,48.42 58.1,49.85
  Bottom 0.152: BUFF_R.2 43.5,6.67 43.5,8.41 45.4,10.32 45.4,16.83 BUFF_SL.3 45.72,19.05 45.72,36.67 46.04,36.99 46.04,46.67 v46.35,46.99 | NOR.2 57.47,68.58 57.47,51.12 REG_FLAGS.11
R1  (via drill 0.35)
  Top 0.152: v64.61,52.7 78.74,52.7 79.38,52.07 LED18.A | ALU0.F1 21.75,10 42.07,10 v44.13,7.94 | BUFF_SR.2 44.45,27.94 v46.67,27.94 | v64.29,17.78 62.71,16.19 48.58,16.19 BUFF_SL.4
  Bottom 0.152: NOR.3 63.98,63.02 63.98,53.34 v64.61,52.7 64.29,52.39 v64.29,17.78 | 44.29,7.78 44.45,7.62 BUFF_R.3 | 47.94,16.83 BUFF_SL.4 | 47.94,16.83 47.94,11.43 44.29,7.78 | 44.29,7.78 v44.13,7.94 | v46.67,27.94 47.94,26.67 47.94,16.83
R2  (via drill 0.35)
  Top 0.152: LED19.A v63.34,54.61 62.39,53.66 v47.47,53.66 | BUFF_SR.3 46.04,32.07 50.01,32.07 50.48,31.59 50.48,28.57 v50.16,28.57 | ALU0.F2 21.91,7.3 49.37,7.3 50.48,6.19 50.48,3.49 48.58,3.49 BUFF_R.4
  Bottom 0.152: v63.34,54.61 62.55,55.4 62.55,59.37 NOR.5 | v50.16,28.57 50.48,28.26 50.48,20.32 49.53,19.37 BUFF_SL.5 50.48,16.83 50.48,8.57 BUFF_R.4 | v47.47,53.66 45.56,51.75 45.56,36.99 44.45,35.88 BUFF_SR.3
R3  (via drill 0.35)
  Top 0.152: NOR.6 61.91,57.47 79.06,57.47 79.38,57.15 LED20.A | ALU0.F3 28.26,6.67 47.94,6.67 BUFF_R.5 | BUFF_SR.4 49.53,27.94 v51.75,27.94 v61.12,27.94
  Bottom 0.152: 53.02,16.83 BUFF_SL.6 | 53.02,16.83 53.02,3.97 52.55,3.49 49.53,3.49 BUFF_R.5 | v51.75,27.94 53.02,26.67 53.02,16.83 | NOR.6 59.37,56.83 59.37,53.18 61.28,51.28 61.28,37.62 60.96,37.31 60.96,28.1 v61.12,27.94
R4  (via drill 0.35)
  Top 0.152: BUFF_SL.7 53.02,19.37 v50.48,19.37 | v70.33,59.05 78.74,59.05 79.38,59.69 LED21.A | ALU1.F0 24.13,54.61 39.85,54.61 42.07,56.83 v50.48,56.83 64.61,56.83 65.56,55.88 NOR.8
  Bottom 0.152: 50.8,19.37 50.8,6.35 BUFF_R.6 | 50.8,19.37 50.8,29.21 BUFF_SR.5 50.8,31.75 50.8,44.93 50.48,45.24 v50.48,56.83 | 50.8,19.37 v50.48,19.37 | v70.33,59.05 70.17,58.9 70.17,57.47 NOR.8
R5  (via drill 0.35)
  Top 0.152: NOR.9 80.64,58.42 80.64,60.48 80.33,60.8 79.53,60.8 LED22.A | v22.07,35.24 30.32,35.24 32.7,32.86 49.69,32.86 BUFF_SR.6 53.66,28.89 63.82,28.89 v67.79,32.86 | BUFF_R.7 v56.36,6.83
  Bottom 0.152: ALU1.F1 21.91,46.67 21.91,41.27 20.48,39.85 20.48,36.83 v22.07,35.24 | BUFF_R.7 53.34,6.35 53.34,29.21 BUFF_SR.6 | BUFF_SL.8 58.1,16.83 58.1,8.57 v56.36,6.83 | NOR.9 69.85,59.69 70.96,59.69 70.96,46.83 67.79,43.66 v67.79,32.86
R6  (via drill 0.35)
  Top 0.152: NOR.11 78.11,63.5 79.38,64.77 LED23.A | ALU1.F2 25.56,40.48 v54.29,40.48 | v65.25,33.02 64.29,32.07 56.2,32.07 BUFF_SR.7
  Bottom 0.152: BUFF_SL.9 60.64,16.83 60.64,3.49 58.74,3.49 BUFF_R.8 55.56,6.67 55.56,31.43 | v54.29,40.48 55.56,39.21 55.56,31.43 | BUFF_SR.7 55.56,31.43 | NOR.11 65.25,60.17 v65.25,33.02
R7  (via drill 0.35)
  Top 0.152: NOR.12 78.11,66.04 79.38,67.31 LED24.A | ALU1.F3 32.86,48.1 v48.74,48.1 | v64.61,53.66 63.34,52.39 v58.74,52.39 56.67,52.39 55.56,51.28 55.56,49.21 51.12,49.21 REG_FLAGS.14
  Bottom 0.152: BUFF_R.9 58.42,6.35 58.42,28.26 58.74,28.57 58.74,29.21 57.47,30.48 | v48.74,48.1 49.53,48.9 REG_FLAGS.14 | NOR.12 70.17,67.63 70.17,69.06 69.69,69.53 64.61,69.53 v64.61,53.66 | 57.47,30.48 58.74,31.75 v58.74,52.39 | 57.47,30.48 BUFF_SR.8
S0  (via drill 0.35)
  Top 0.152: LED29.A 5.71,12.7 3.81,14.61 3.81,19.21 6.67,19.21 7.94,20.48 7.94,21.75 20.16,21.75 ALU0.S0 21.27,22.54 | 21.27,22.54 v23.34,24.61 | v91.92,23.5 91.12,24.29 69.22,24.29 67.47,22.54 21.27,22.54
  Bottom 0.152: ALU1.S0 23.34,55.4 v23.34,24.61 | v91.92,23.5 91.92,23.34 93.66,23.34 94.77,22.23 94.77,20.64 93.66,19.53 JP1.43
S1  (via drill 0.35)
  Top 0.152: v4.45,15.24 LED30.A | v22.38,13.02 28.42,13.02 30.32,11.11 62.71,11.11 65.09,13.49 86.36,13.49 86.36,16.03 86.68,16.35 93.03,16.35 93.5,16.83 JP1.45
  Bottom 0.152: v4.45,15.24 9.37,20.16 14.61,20.16 | 18.73,20.16 14.61,20.16 | 18.73,20.16 18.73,22.54 ALU0.S1 | ALU1.S1 21.91,62.55 21.91,66.52 21.43,66.99 16.35,66.99 16.35,33.02 14.61,31.27 14.61,20.16 | v22.38,13.02 18.73,13.02 18.73,20.16
S2  (via drill 0.35)
  Top 0.152: LED31.A 8.26,20.16 8.26,21.43 15.88,21.43 v16.19,21.11 16.67,20.64 30.64,20.64 31.43,21.43 62.71,21.43 v63.18,20.95
  Bottom 0.152: v16.19,21.11 18.73,23.65 18.73,25.08 | ALU0.S2 18.73,25.08 | ALU1.S2 18.73,61.91 18.73,25.08 | v63.18,20.95 63.18,17.14 71.44,17.14 73.03,15.56 73.03,14.45 93.5,14.45 JP1.47
S3  (via drill 0.35)
  Top 0.152: 5.71,20.32 5.71,24.61 5.08,24.61 3.81,25.88 3.81,27.78 6.67,27.78 8.26,26.19 8.26,25.56 16.67,25.56 19.05,27.94 | ALU0.S3 19.05,27.94 | 19.05,27.94 v17.46,29.53 | 5.71,20.32 3.49,20.32 3.49,6.67 8.26,1.91 71.44,1.91 75.09,5.56 97.31,5.56 97.31,9.53 96.52,10.32 95.09,10.32 93.66,11.75 JP1.49 | 5.71,20.32 LED32.A
  Bottom 0.152: ALU1.S3 17.46,63.18 v17.46,29.53
VCC  (via drill 0.35)
  Top 0.508: C3.1 27.94,74.93 40.64,74.93 40.8,75.09 | C2.1 40.8,75.09 | 40.8,75.09 40.96,74.93 53.34,74.93 C4.1 55.88,74.93 66.04,74.93 C7.1 | JP1.4 96.04,70.17 93.66,70.17 JP1.3 93.66,70.33 93.66,71.12 | JP1.2 96.04,72.71 93.66,72.71 JP1.1 93.66,72.55 93.66,71.12 | NOR.14 93.66,71.12 | REG_FLAGS.16 43.18,49.53 C10.1 | BUFF_SR.20 38.1,36.83 C8.1 31.75,39.37 C9.1 | LED34.A 79.53,20.48 LED35.A 79.53,17.94 LED37.A LED38.A 79.38,15.08 79.22,14.92 v72.39,14.92 | C1.+ 68.1,6.83 59.21,6.83 58.26,5.87 58.26,2.86 41.59,2.86 BUFF_R.1
  Bottom 0.508: AND.14 54.61,72.39 C4.1 | C2.1 41.91,72.39 NOT.14 44.93,69.37 44.93,51.28 REG_FLAGS.16 | NOR.14 67.79,71.91 67.79,75.72 C7.1 | C10.1 38.1,48.26 38.1,39.37 BUFF_SR.20 BUFF_SR.1 BUFF_SL.20 C5.1 C6.1 39.21,13.97 BUFF_R.20 | v72.39,14.92 68.58,11.11 C1.+ | BUFF_R.20 BUFF_R.1 | BUFF_R.20 BUFF_SL.1
Z
  Bottom 0.152: REG_FLAGS.13 55.88,54.61 AND.8

## Text on the board
tPlace: Operand X | Result | 7 | 7 | 6 | 6 | 5 | 5 | 4 | 4 | 3 | 3 | 2 | 2 | 1 | 1 | 0 | 0 | Operand Y | 7 | Flags | 6 | 5 | P | 4 | C | 3 | Z | 2 | N | 1 | 0 | Control | Operation | WR FL | S3 | RD RES | S2 | RD SL | S1 | RD SR | S0 | M | Cin